# Altium PCB Narwhal_main_FIX.PcbDoc (part 1 of 2)
Units mm, origin at the board's own origin, x right, y up, seen from the top; angles counter-clockwise.
Board outline 83 x 16.93 mm, 4 copper layers (Top Layer, Layer 1, Layer 2, Bottom Layer), stack 1.58 mm thick; 96 components, 73 nets, 381 pads, 194 vias.
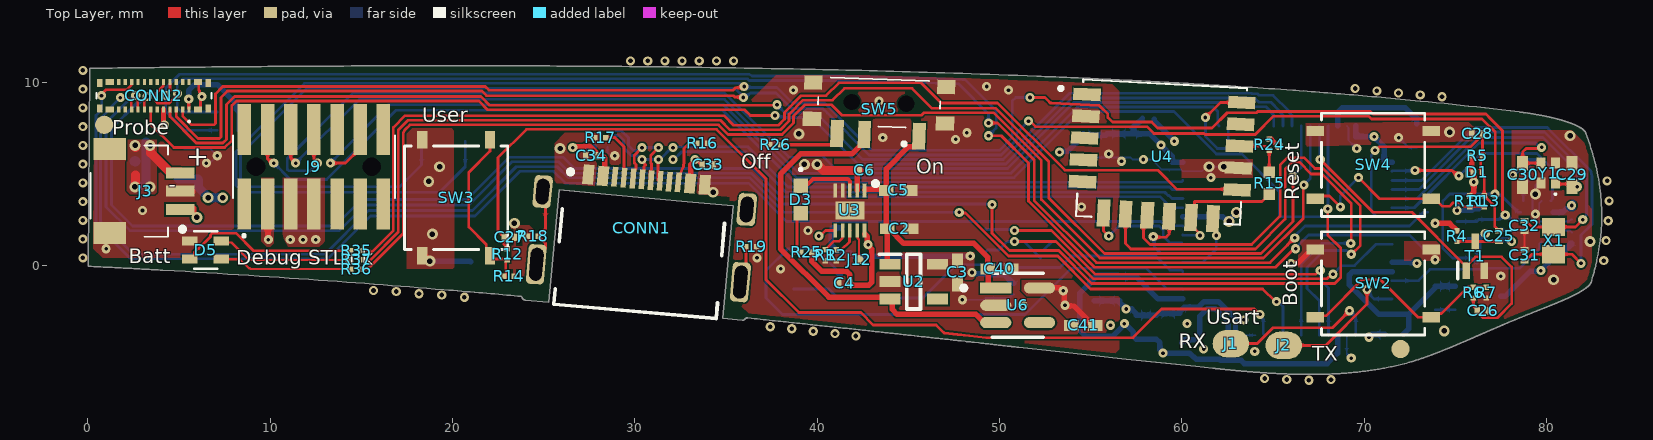
[diagram p0: Top Layer view]
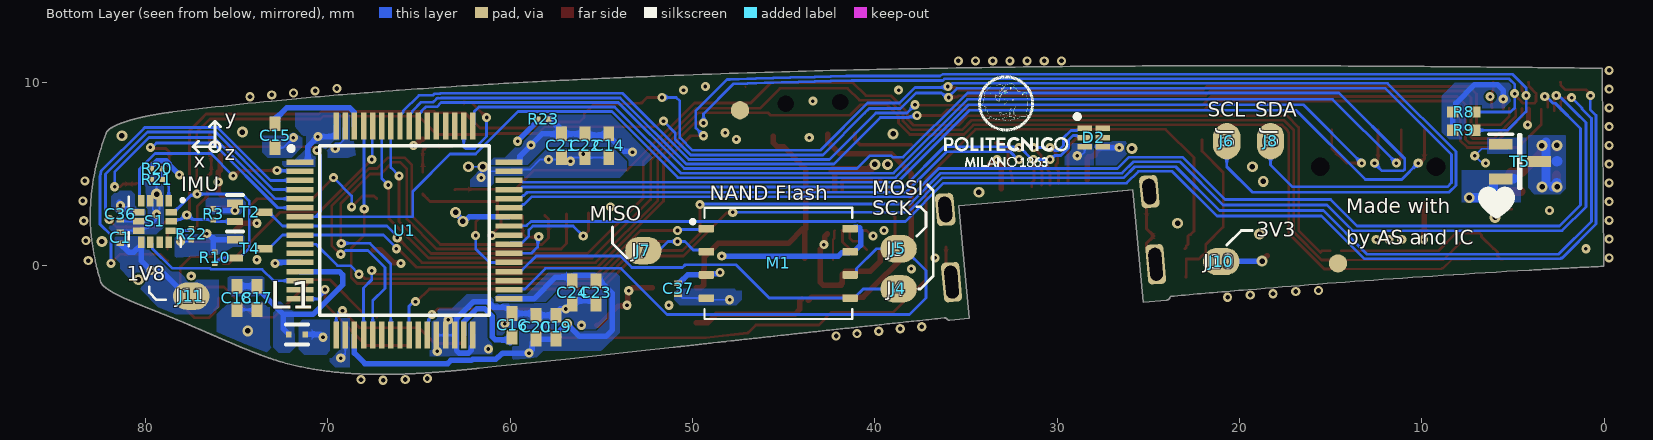
[diagram p1: Bottom Layer view, seen from below]
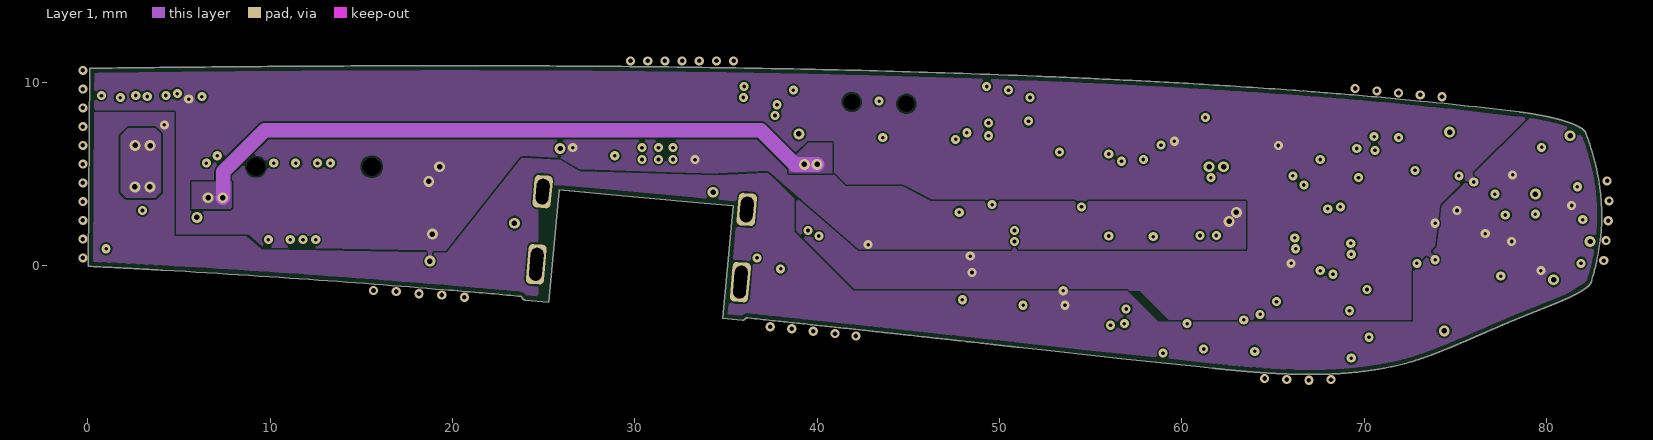
[diagram p2: Layer 1]
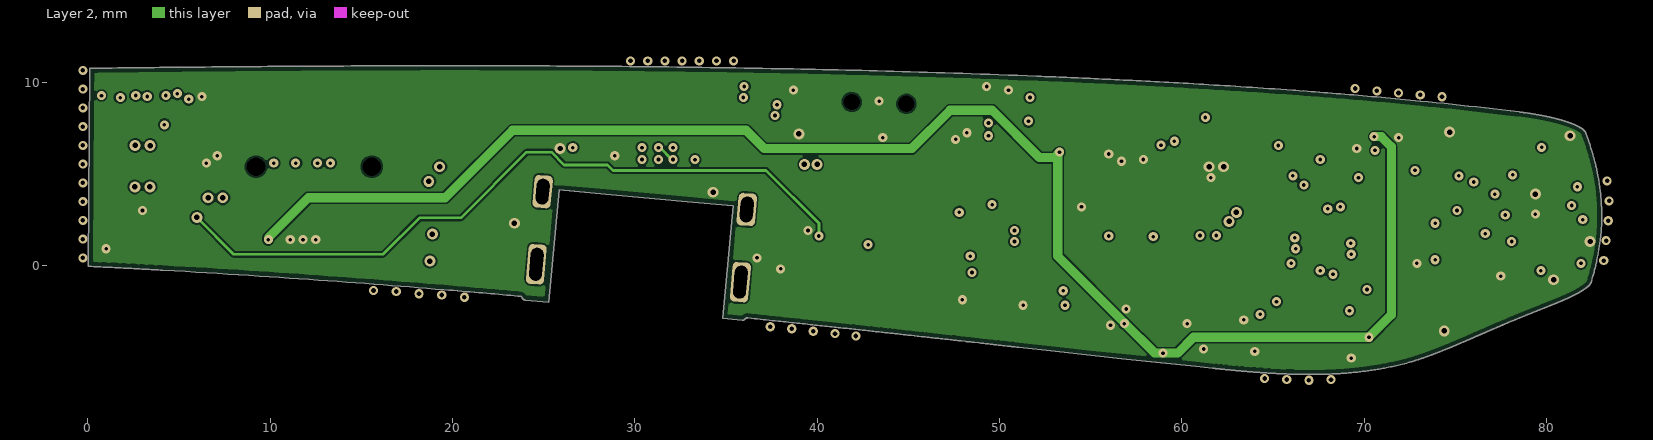
[diagram p3: Layer 2]
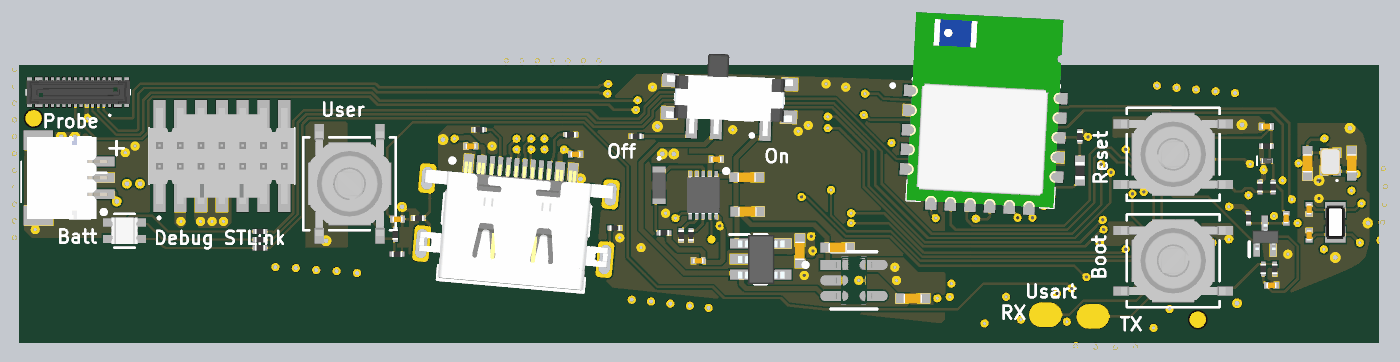
[diagram p5: 3D render of the assembled board from above, using the file's embedded part models]
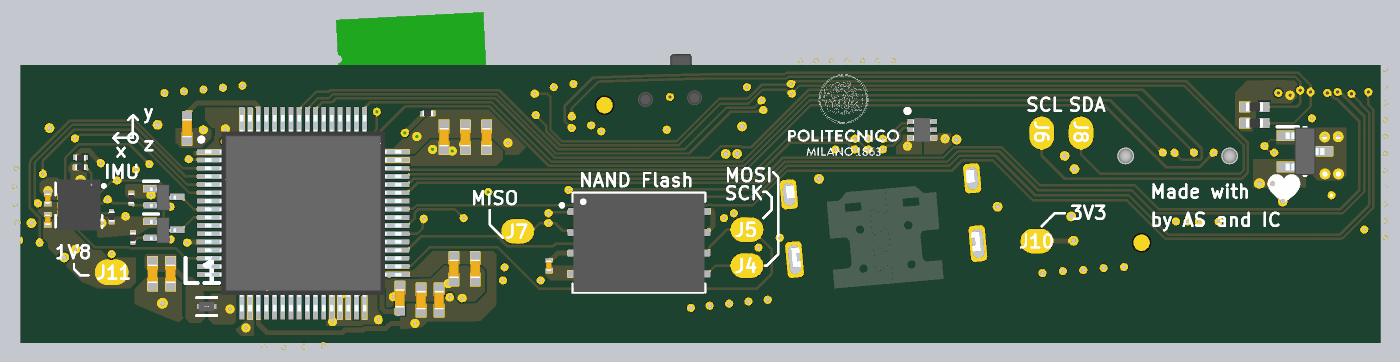
[diagram p6: 3D render of the assembled board from below, using the file's embedded part models]

## Layer stack, top to bottom
Top Solder: solder mask 0.0102, Solder Resist, Dk 3.5
Top Layer: signal copper 0.0356
Dielectric 2: prepreg 0.4795, PP-006, Dk 4.1
Layer 1: signal copper 0.035
Dielectric 1: dielectric 0.4795, FR-4, Dk 4.8
Layer 2: signal copper 0.035
Dielectric 3: prepreg 0.4795, PP-006, Dk 4.1
Bottom Layer: signal copper 0.0356
Bottom Solder: solder mask 0.0102, Solder Resist, Dk 3.5

## Board outline
2891 vertices, not listed, extent 0.031,-5.992 83.035,10.939

## Design rules (kind name [scope] priority, off if disabled: settings)
BoardOutlineClearance [All] p1: gap=0.254 ignorepadtopadclearanceinfootprint=FALSE except(0: Arc-SplitContinuation Track-SplitContinuation SMDPad-SplitContinuation THPad-SplitContinuation Via-SplitContinuation Fill-SplitContinuation Poly-SplitContinuation Region-SplitContinuation Text-SplitContinuation)
Clearance [All] p1: gap=0.1 ignorepadtopadclearanceinfootprint=FALSE
ComponentClearance [All] p1 off: gap=0.254 collisioncheckmode=3 verticalgap=0.254 showdistances=FALSE
DiffPairsRouting [All] p1: maxlimit=10 minlimit=0.125 mostfreqgap=0.15 toplayer_minwidth=0.156 toplayer_maxwidth=0.381 toplayer_prefwidth=0.381 midlayer1_minwidth=0.156 midlayer1_maxwidth=0.381 midlayer1_prefwidth=0.381 midlayer2_minwidth=0.156 midlayer2_maxwidth=0.381 midlayer2_prefwidth=0.381 bottomlayer_minwidth=0.156 bottomlayer_maxwidth=0.381 bottomlayer_prefwidth=0.381 maxuncoupledlength=12.7
FabricationTestPointUsage FabricationTestPointUsage_1 [All] p1: valid=0 allowmultiple=FALSE
FabricationTestpoint FabricationTestpoint_1 [All] p1: side=3 testpointundercomponent=TRUE minsize=1.016 maxsize=2.54 preferedsize=1.524 minholesize=0 maxholesize=1.016 preferedholesize=0.813 testpointgrid=0.025 allowsidetop=TRUE allowsidebottom=TRUE usegrid=TRUE gridtolerance=0
HoleSize [All] p1: absolutevalues=TRUE maxlimit=6 minlimit=0.2 maxpercent=80.000 minpercent=20.000
HoleSize FabricationTestpoint [All] p2 off: absolutevalues=TRUE maxlimit=2.54 minlimit=0.025 maxpercent=80.000 minpercent=20.000
HoleSize FabricationTestPointUsage [All] p3 off: absolutevalues=TRUE maxlimit=2.54 minlimit=0.025 maxpercent=80.000 minpercent=20.000
MinimumSolderMaskSliver [All] p1 off: minsoldermaskwidth=0.07
MinimumSolderMaskSliver SilkscreenOverComponentPads [All] p2: minsoldermaskwidth=0.1
PlaneClearance [All] p1: clearance=0.5
PlaneConnect [All] p1: planeconnectstyle=Relief reliefexpansion=0.4 reliefentries=4 reliefconductorwidth=0.15 reliefairgap=0.15
PolygonConnect [All] p1: connectstyle=Direct reliefconductorwidth=0.15 reliefentries=4 polygonreliefangle="90 Angle" airgapwidth=0.254
RoutingCorners [All] p1: cornerstyle=45-Degree minsetback=1.25 maxsetback=1.25
RoutingVias [All] p1: holewidth=0.3 width=0.6 viastyle="Through Hole" minholewidth=0.2 minwidth=0.45 maxholewidth=0.45 maxwidth=0.75
SilkToSilkClearance [All] p1 off: silktosilkclearance=0.254
SilkToSolderMaskClearance [IsPad] p1 off: minsilkscreentomaskgap=0.254 clearancetoexposedcopper=TRUE
SolderMaskExpansion Via [IsVia] p1: expansion=-0.61 istentingtop=FALSE
SolderMaskExpansion [All] p2: expansion=0.03 istentingtop=FALSE
SupplyNets "Schematic Supply Nets" [InNet('SYS')] p1: voltage=0.000
SupplyNets "Schematic Supply Nets_7" [InNet('5V_USB')] p2: voltage=0.000
SupplyNets "Schematic Supply Nets_5" [InNet('GND')] p3: voltage=0.000
SupplyNets "Schematic Supply Nets_6" [InNet('3V3')] p4: voltage=0.000
SupplyNets "Schematic Supply Nets_4" [InNet('3V3_BLE')] p5: voltage=0.000
SupplyNets "Schematic Supply Nets_2" [InNet('1V8')] p6: voltage=0.000
SupplyNets "Schematic Supply Nets_1" [InNet('MCU_3V3')] p7: voltage=0.000
Width [All] p1: maxlimit=10 minlimit=0.1 preferedwidth=0.15
19 further rules are at their usual default settings.

## Classes and differential pairs
component class Power: C2 C3 C4 C5 C6 C40 C41 D3 D5 J3 J10 J11 J12 R1 R2 R25 R26 R35 R36 R37 SW5 T5 U2 U3 U6
component class Peripherals: C1 C33 C34 C36 C37 CONN1 CONN2 D2 J1 J2 J4 J5 J6 J7 J8 M1 R15 R16 R17 R18 R19 R20 R21 R22 R24 S1 U4
component class Microcontroller: C14 C15 C16 C17 C18 C19 C20 C21 C22 C23 C24 C25 C26 C27 C28 C29 C30 C31 C32 D1 J9 L1 R3 R4 R5 R6 R7 R8 R9 R10 R11 R12 R13 R14 R23 SW2 SW3 SW4 T1 T2 T4 U1 X1 Y1
differential pair USB_OTG: +USB_OTG_P -USB_OTG_N

## Components (designator, comment, footprint, x,y, rotation, side; value= is the part's Value field where it differs from the comment)
C1 "0201ZD104KAT2A" Chip2PinSM127P600-8N#1 81.4,1.5 r270 bottom value=100nF
C2 "0402YD105KAT4A" Chip2PinSM127P600-8N#2 44.5,2 r180 top value=1µF
C3 "LMK105BJ225MV-F" Chip2PinSM127P600-8N#2 47.7,-0.4 r90 top value=2.2µF
C4 "CL03A105KP3NSNC" Chip2PinSM127P600-8N#1 41.5,-1 r0 top value=1µF
C5 "0402ZD106MAT2A" Chip2PinSM127P600-8N#2 44.45,4.1 r0 top value=10µF
C6 "CL03A105KP3NSNC" Chip2PinSM127P600-8N#1 42.6,5.2 r180 top value=1µF
C14 "0402YC104JAT4A" Chip2PinSM127P600-8N#2 54.6,6.55 r90 bottom value=100nF
C15 "TMK105BJ105MV-F" Chip2PinSM127P600-8N#2 72.9,7.1 r90 bottom value=1µF
C16 "TMK105BJ105MV-F" Chip2PinSM127P600-8N#2 59.9,-3.3 r270 bottom value=1µF
C17 "TMK105BJ105MV-F" Chip2PinSM127P600-8N#2 73.9,-1.8 r90 bottom value=1µF
C18 "0402YC104JAT4A" Chip2PinSM127P600-8N#2 75,-1.8 r90 bottom value=100nF
C19 "0402ZD106MAT2A" Chip2PinSM127P600-8N#2 57.5,-3.4 r270 bottom value=10µF
C20 "0402YC104JAT4A" Chip2PinSM127P600-8N#2 58.6,-3.4 r270 bottom value=100nF
C21 "0402ZD106MAT2A" Chip2PinSM127P600-8N#2 57.2,6.55 r90 bottom value=10µF
C22 "0402YC104JAT4A" Chip2PinSM127P600-8N#2 55.9,6.55 r90 bottom value=100nF
C23 "0402ZD106MAT2A" Chip2PinSM127P600-8N#2 55.3,-1.5 r90 bottom value=10µF
C24 "0402YC104JAT4A" Chip2PinSM127P600-8N#2 56.6,-1.5 r90 bottom value=100nF
C25 "02016D475MAT2A" Chip2PinSM127P600-8N#1 77.4,1.6 r90 top value=4.7µF
C26 "CL03A105KP3NSNC" Chip2PinSM127P600-8N#1 76.5,-2.5 r180 top value=1µF
C27 "CL03A105KP3NSNC" Chip2PinSM127P600-8N#1 23.129,1.539 r180 top value=1µF
C28 "CL03A105KP3NSNC" Chip2PinSM127P600-8N#1 76.2,7.2 r0 top value=1µF
C29 "C0402C309K4GACTU" Chip2PinSM127P600-8N#2 81.4,4.95 r270 top value=3pF
C30 "C0402C309K4GACTU" Chip2PinSM127P600-8N#2 78.7,4.95 r90 top value=3pF
C31 "GRM0335C1E180JA01D" Chip2PinSM127P600-8N#1 78.8,0.55 r270 top value=18pF
C32 "GRM0335C1E180JA01D" Chip2PinSM127P600-8N#1 78.8,2.15 r90 top value=18pF
C33 "CL03A105KP3NSNC" Chip2PinSM127P600-8N#1 34,5.5 r180 top value=1µF
C34 "CL03A105KP3NSNC" Chip2PinSM127P600-8N#1 27.6,6 r0 top value=1µF
C36 "0201ZD104KAT2A" Chip2PinSM127P600-8N#1 81.4,2.8 r90 bottom value=100nF
C37 "CL03A105KP3NSNC" Chip2PinSM127P600-8N#1 50.8,-1.3 r90 bottom value=1µF
C40 "0402YD105KAT4A" Chip2PinSM127P600-8N#2 50,-0.2 r180 top value=1µF
C41 "LMK105BJ225MV-F" Chip2PinSM127P600-8N#2 54.6,-3.3 r0 top value=2.2µF
CONN1 "USB4510-03-1-A" USB4510-03-1-A-Footprint-1 30.297,0.706 r355 top
CONN2 "BM29B0.6-24DS/2-0.35V(51)" BM29B0.6-24DS_2-0.35V(51)-Footprint-1 3.753,9.292 r0 top
D1 "SDM02U30LP3-7B" SDM02U30LP3-7B-Footprint-1 76.21,5.1 r0 top
D2 "HSP062-2M6" HSP062-2M6-Footprint-1 28,7 r180 bottom
D3 "KS EELP41.22-P1R2-58-A8J8-020-R18" "KS EELP41.22-P1R2-58-A8J8-020-R18-Footprint-1" 39.1,3.6 r270 top
D5 "XZM2ACRM2DGFBB110W" XZM2ACRM2DGFBB110W-Footprint-1 6.456,0.831 r0 top
J1 "Pad" Pad-Footprint-1#1 62.7,-4.3 r0 top
J2 "Pad" Pad-Footprint-1#1 65.6,-4.4 r0 top
J3 "SM03B-SRSS-TB(LF)(SN)" SM03B-SRSS-TB(LF)(SN)-Footprint-1 2.61,4.064 r270 top
J4 "Pad" Pad-Footprint-1#1 38.7,-1.3 r180 bottom
J5 "Pad" Pad-Footprint-1#1 38.7,0.9 r180 bottom
J6 "Pad" Pad-Footprint-1#1 20.7,6.8 r270 bottom
J7 "Pad" Pad-Footprint-1#1 52.7,0.8 r180 bottom
J8 "Pad" Pad-Footprint-1#1 18.3,6.8 r270 bottom
J9 "FTSH-107-01-L-DV-K-A" FTSH-107-01-L-DV-K-A-Footprint-1 12.4,5.4 r0 top
J10 "Pad" Pad-Footprint-1#1 21,0.2 r180 bottom
J11 "Pad" Pad-Footprint-1#1 77.5,-1.7 r180 bottom
J12 "Pad" Pad-Footprint-1#2 42.3,0.3 r90 top
L1 "PLEA67BBA2R2M-1PT00" FP-PLEA67-MFG 71.7,-3.8 r180 bottom
M1 "MT29F4G01ABAFDWB-IT:F TR" "MT29F4G01ABAFDWB-IT:F TR-Footprint-1" 45.3,0.1 r180 bottom
R1 "TNPW020118K0BEED" Chip2PinSM127P600-8N#3 40.45,0.55 r90 top value=18k
R2 "TNPW02013K00BEED" Chip2PinSM127P600-8N#3 41.05,0.55 r90 top value=3k
R3 "CR0201-JW-472GLF" Chip2PinSM127P600-8N#3 76.3,2.8 r90 bottom value=4.7k
R4 "ERJ-1GNJ104C" Chip2PinSM127P600-8N#3 75.1,1.6 r90 top value=100k
R5 "ERJ-1GNJ104C" Chip2PinSM127P600-8N#3 76.2,6 r180 top value=100k
R6 "CR0201-FW-3302GLF" Chip2PinSM127P600-8N#3 76,-1.5 r90 top value=33k
R7 "CR0201-JW-472GLF" Chip2PinSM127P600-8N#3 76.7,-1.5 r90 top value=4.7k
R8 "CRCW04024K70FKED" RESC1005X04N 7.7,8.4 r0 bottom value=4.7k
R9 "CRCW04024K70FKED" RESC1005X04N 7.7,7.4 r0 bottom value=4.7k
R10 "CR0201-JW-472GLF" Chip2PinSM127P600-8N#3 76.2,0.4 r90 bottom value=4.7k
R11 "CR0201-JW-472GLF" Chip2PinSM127P600-8N#3 75.8,3.5 r90 top value=4.7k
R12 "CR0201-FW-3302GLF" Chip2PinSM127P600-8N#3 23,0.6 r270 top value=33k
R13 "CR0201-FW-3302GLF" Chip2PinSM127P600-8N#3 76.6,3.5 r270 top value=33k
R14 "CR0201-JW-472GLF" Chip2PinSM127P600-8N#3 23.1,-0.6 r180 top value=4.7k
R15 "CRCW04024K70FKED" RESC1005X04N 64.8,4.5 r90 top value=4.7k
R16 "ERJ-1GNF5101C" Chip2PinSM127P600-8N#3 33.7,6.7 r180 top value=5.1k
R17 "ERJ-1GNF5101C" Chip2PinSM127P600-8N#3 28.1,7 r0 top value=5.1k
R18 "CRCW02010000Z0ED" Chip2PinSM127P600-8N#3 24.4,1.6 r0 top value=0
R19 "CRCW02010000Z0ED" Chip2PinSM127P600-8N#3 36.4,1 r180 top value=0
R20 "CRCW02010000Z0ED" Chip2PinSM127P600-8N#3 79.4,5.3 r180 bottom value=0
R21 "CRCW02010000Z0ED" Chip2PinSM127P600-8N#3 79.4,4.7 r180 bottom value=0
R22 "CR0201-JW-472GLF" Chip2PinSM127P600-8N#3 77.5,1.7 r270 bottom value=4.7k
R23 "CRCW02010000Z0ED" Chip2PinSM127P600-8N#3 58.2,8 r0 bottom value=0
R24 "CRCW02010000Z0ED" Chip2PinSM127P600-8N#3 64.8,6.6 r90 top value=0
R25 "CRCW0201665RFKED" Chip2PinSM127P600-8N#3 39.4,0.7 r180 top value=665
R26 "ERJ-1GNJ104C" Chip2PinSM127P600-8N#3 37.7,6.6 r0 top value=100k
R35 "CRCW0201360RFKED" Chip2PinSM127P600-8N#3 14.726,0.786 r0 top value=360
R36 "CRCW0201360RFKED" Chip2PinSM127P600-8N#3 14.726,-0.214 r0 top value=360
R37 "ERA-1AEB4990C" Chip2PinSM127P600-8N#3 14.726,0.286 r0 top value=499
S1 "LSM6DSO16IS" LSM6DSO16IS-Footprint-1 79.5,2.4 r270 bottom
SW2 "PTS526SK15SMTR2LFS" PTS526SK15SMTR2LFS-Footprint-1 70.5,-1 r180 top
SW3 "PTS526SK15SMTR2LFS" PTS526SK15SMTR2LFS-Footprint-1 20.2,3.7 r90 top
SW4 "PTS526SK15SMTR2LFS" PTS526SK15SMTR2LFS-Footprint-1 70.5,5.5 r0 top
SW5 "EG1215AA" EG1215AA-Footprint-1 43.4,8.9 r178 top
T1 "DMN26D0UT-7" DMN26D0UT-7-Footprint-1 76.1,0.5 r90 top
T2 "DMN26D0UT-7" DMN26D0UT-7-Footprint-1 74.3,2.9 r180 bottom
T4 "DMN26D0UT-7" DMN26D0UT-7-Footprint-1 74.3,0.9 r180 bottom
T5 "SI2323DS-T1-GE3" SI2323DS-T1-GE3-Footprint-1 4.623,5.683 r180 bottom
U1 "STM32U575RIT6Q" STM32U575RIT6Q-Footprint-1 65.8,1.9 r180 bottom
U2 "AP2205-33W5-7" AP2205-33W5-7-Footprint-1 45.3,-0.9 r0 top
U3 "BQ25185DLHR" BQ25185DLHR-Footprint-1 41.8,3 r270 top
U4 "RN4871-V/RM140" RN4871-V_RM118-Footprint-1 59,8.2 r357 top
U6 "AP2205-18W5-7" AP2205-18W5-7-Footprint-1 51,-2.2 r0 top
X1 "NX2012SA-32.768K-STD-MUB-1" NX2012SA-32.768K-STD-MUB-1-Footprint-1 80.4,1.35 r270 top
Y1 "830072539" 830072539-Footprint-1 80.1,5.05 r90 top

## Footprints (in the part's own frame and the unit in brackets; to place one, negate y for a bottom-side part, rotate by r counter-clockwise, add the part's x,y. Pads: shape width x height; smd on the part's side, far side on the other; paste and mask are expansions set on the pad)
830072539-Footprint-1 [mm]
  rect 0.6x0.5 smd: 1(-0.55,-0.4) 2(0.55,-0.4) 3(0.55,0.4) 4(-0.55,0.4)
  silkscreen extent -1.2,-0.45 -1.1,-0.35, body extent -0.8,-0.6 0.8,0.6, height 0.4
AP2205-18W5-7-Footprint-1 [mm]
  rect 1.707x0.616 smd paste+0 mask+0: 1(-1.201,0.95)
  rrect100% 1.707x0.616 smd paste+0 mask+0: 2(-1.201,0) 3(-1.201,-0.95) 4(1.201,-0.95) 5(1.201,0.95)
  silkscreen extent -3.08,-1.75 1.4,1.75, body extent -1.4,-1.47 1.4,1.45, height 1.45
AP2205-33W5-7-Footprint-1 [mm]
  rect 1.15x0.6 smd: 1(-1.3,0.95) 2(-1.3,0) 3(-1.3,-0.95) 4(1.3,-0.95) 5(1.3,0.95)
  silkscreen extent -1.88,-1.5 0.38,1.5, body extent -1.39,-1.52 1.46,1.48, height 1.4
BM29B0.6-24DS_2-0.35V(51)-Footprint-1 [mm]
  rect 0.18x0.32 smd mask+0.05: 1(1.798,-0.75) 2(1.798,0.75) 3(1.448,-0.75) 4(1.448,0.75) 5(1.098,-0.75) 6(1.098,0.75) 7(0.748,-0.75) 8(0.748,0.75) 9(0.398,-0.75) 10(0.398,0.75) 11(0.048,-0.75) 12(0.048,0.75) 13(-0.302,-0.75) 14(-0.302,0.75) 15(-0.652,-0.75) 16(-0.652,0.75) 17(-1.002,-0.75) 18(-1.002,0.75) 19(-1.352,-0.75) 20(-1.352,0.75) 21(-1.702,-0.75) 22(-1.702,0.75) 23(-2.052,-0.75) 24(-2.052,0.75)
  rect 0.46x0.32 smd mask+0.05: P1_1(2.288,-0.75) P1_2(2.288,0.75) P2_1(-2.542,-0.75) P2_2(-2.542,0.75)
  rect 0.3x0.42 smd: P1_3(2.838,-0.7) P1_4(2.838,0.7) P2_3(-3.092,-0.7) P2_4(-3.092,0.7)
  silkscreen extent -3.28,-1.46 3.03,0.15, body extent -3.28,-0.75 3.03,0.75, height 0.57
BQ25185DLHR-Footprint-1 [mm]
  rect 0.75x0.2 smd: 1(-1.1,0.8) 2(-1.1,0.4) 3(-1.1,0) 4(-1.1,-0.4) 5(-1.1,-0.8) 6(1.1,-0.8) 7(1.1,-0.4) 8(1.1,0) 9(1.1,0.4) 10(1.1,0.8)
  rect 1x1.6 smd: 11(0,0)
  silkscreen extent -1.6,1.28 -1.35,1.53, body extent -1.15,-1 1.15,1, height 0.8
Chip2PinSM127P600-8N#1 [mm] "Chip capacitor ceramic multilayer, 0201in, SMD"
  rect 0.3x0.42 smd: 1(-0.3,0) 2(0.3,0)
  body extent -0.33,-0.18 0.33,0.18, height 0.35
Chip2PinSM127P600-8N#2 [mm] "Chip Capacitor Ceramic Multilayer, 0402in, SMD"
  rect 0.8x0.6 smd: 1(-0.65,0) 2(0.65,0)
  body extent -0.58,-0.3 0.58,0.3, height 0.6
Chip2PinSM127P600-8N#3 [mm] "Chip Resistor, 0201in, SMD"
  rect 0.3x0.3 smd: 1(-0.3,0) 2(0.3,0)
  body extent -0.32,-0.17 0.32,0.17, height 0.26
DMN26D0UT-7-Footprint-1 [mm]
  rect 0.9x0.4 smd: 1(-0.8,0.5) 2(-0.8,-0.5) 3(0.8,0)
  silkscreen extent -1.25,0.95 -0.35,0.95, body extent -0.86,-0.83 0.74,0.77, height 0.9
EG1215AA-Footprint-1 [mm]
  rect 0.7x1.5 smd: 1(-2.25,1.75) 2(0.75,1.75) 3(2.25,1.75)
  round 0.45 hole 0.9 unplated: MH1(-1.5,0) MH2(1.5,0)
  rect 1x0.8 smd: MP1(-3.65,1) MP2(3.65,1) MP3(-3.65,-1) MP4(3.65,-1)
  silkscreen extent -3.35,-1.3 3.35,2.3, body extent -3.85,-2.7 3.85,2.2, height 1.4
FP-PLEA67-MFG [mm]
  rect 0.31x0.32 smd paste+0 mask+0: 1(-0.445,0) 2(0.445,0)
  silkscreen extent -0.6,-0.55 0.6,0.55, body extent -0.5,-0.3 0.5,0.3, height 0.8
FTSH-107-01-L-DV-K-A-Footprint-1 [mm]
  rect 0.74x2.79 smd: 1(-3.81,-2.035) 2(-3.81,2.035) 3(-2.54,-2.035) 4(-2.54,2.035) 5(-1.27,-2.035) 6(-1.27,2.035) 7(0,-2.035) 8(0,2.035) 9(1.27,-2.035) 10(1.27,2.035) 11(2.54,-2.035) 12(2.54,2.035) 13(3.81,-2.035) 14(3.81,2.035)
  round 0.51 hole 1.02 unplated: 15(-3.175,0) 16(3.175,0)
  silkscreen extent -4.44,-3.83 4.44,1.72, body extent -4.44,-2.92 4.44,2.92, height 6.1
HSP062-2M6-Footprint-1 [mm]
  rect 0.8x0.3 smd: 1(-0.5,0.5) 2(-0.5,0) 3(-0.5,-0.5) 4(0.5,-0.5) 5(0.5,0) 6(0.5,0.5)
  silkscreen extent -1.03,1.03 -0.78,1.27, body extent -0.55,-0.72 0.55,0.72, height 0.6
"KS EELP41.22-P1R2-58-A8J8-020-R18-Footprint-1" [mm]
  rect 0.8x0.8 smd: 1(-0.75,0) 2(0.75,0)
  silkscreen extent -1.7,-0.05 -1.6,0.05, body extent -0.8,-0.4 0.8,0.4, height 0.6
LSM6DSO16IS-Footprint-1 [mil]
  rect 25x14 smd paste+0 mask+4: 1(-44.49,29.9) 2(-44.49,10.21) 3(-44.49,-9.48) 4(-44.49,-29.17) 8(44.51,-29.17) 9(44.51,-9.48) 10(44.51,10.21) 11(44.51,29.9)
  rect 14x25 smd paste+0 mask+4: 5(-19.68,-34.64) 6(0.01,-34.64) 7(19.7,-34.64) 12(19.7,35.36) 13(0.01,35.36) 14(-19.68,35.36)
  silkscreen extent -53,-56 54,62, body extent -61,-51 61,51, height 34
"MT29F4G01ABAFDWB-IT:F TR-Footprint-1" [mm]
  rrect25% 0.84x0.42 smd: 1(-3.945,1.905) 2(-3.945,0.635) 3(-3.945,-0.635) 4(-3.945,-1.905) 5(3.945,-1.905) 6(3.945,-0.635) 7(3.945,0.635) 8(3.945,1.905)
  silkscreen extent -4.8,-3.05 4.05,3.05, body extent -4,-3 4,3, height 0.65
NX2012SA-32.768K-STD-MUB-1-Footprint-1 [mm]
  rect 1x1.25 smd: 1(-0.75,0) 2(0.75,0)
  body extent -1.02,-0.6 1.02,0.6, height 0.55
Pad-Footprint-1#1 [mm]
  oval 2x1.5 smd paste-0.75: 1(0,0)
Pad-Footprint-1#2 [mm]
  round 0.5 smd paste-0.25: 1(0,0)
PTS526SK15SMTR2LFS-Footprint-1 [mil]
  rect 37.5x22 smd paste+0 mask+0: 1(-125.25,73) 2(125.25,73) 3(-125.25,-73) 4(125.25,-73)
  silkscreen extent -112,-112 112,112, body extent -126,-100 126,100, height 60
RESC1005X04N [mm] "Chip Resistor, 0402in, 2-Leads, Body 1,00x0,50mm, IPC Medium Density"
  rect 0.635x0.61 smd: 1(-0.597,0) 2(0.597,0)
  body extent -0.53,-0.28 0.53,0.28, height 0.4
RN4871-V_RM118-Footprint-1 [mm]
  rect 1.5x0.7 smd: 1(-4.25,0.95) 2(-4.25,-0.25) 3(-4.25,-1.45) 4(-4.25,-2.65) 5(-4.25,-3.85) 12(4.25,-3.85) 13(4.25,-2.65) 14(4.25,-1.45) 15(4.25,-0.25) 16(4.25,0.95)
  rect 0.7x1.5 smd: 6(-3,-5.5) 7(-1.8,-5.5) 8(-0.6,-5.5) 9(0.6,-5.5) 10(1.8,-5.5) 11(3,-5.5)
  silkscreen extent -5.8,-5.75 4.5,1.75, body extent -4.5,-5.75 4.5,5.75, height 2.1
SDM02U30LP3-7B-Footprint-1 [mm]
  rect 0.23x0.3 smd: 1(-0.254,0) 2(0.254,0)
  silkscreen extent -0.58,-0.25 -0.58,0.26, body extent -0.31,-0.16 0.31,0.16, height 0.3
SI2323DS-T1-GE3-Footprint-1 [mm]
  rect 1.3x0.6 smd: 1(-1.05,0.95) 2(-1.05,-0.95) 3(1.05,0)
  silkscreen extent -1.7,-1.46 0.05,1.5, body extent -1.18,-1.46 1.18,1.46, height 1.12
SM03B-SRSS-TB(LF)(SN)-Footprint-1 [mm]
  rect 0.6x1.55 smd: 1(-1,2.463) 2(0,2.463) 3(1,2.463)
  rect 1.2x1.8 smd: MP1(-2.3,-1.413) MP2(2.3,-1.413)
  silkscreen extent -2.5,-2.46 2.5,1.79, body extent -2.5,-2.12 2.5,2.83, height 2.9
STM32U575RIT6Q-Footprint-1 [mm]
  rect 1.475x0.3 smd: 1(-5.738,3.75) 2(-5.738,3.25) 3(-5.738,2.75) 4(-5.738,2.25) 5(-5.738,1.75) 6(-5.738,1.25) 7(-5.738,0.75) 8(-5.738,0.25) 9(-5.738,-0.25) 10(-5.738,-0.75) 11(-5.738,-1.25) 12(-5.738,-1.75) 13(-5.738,-2.25) 14(-5.738,-2.75) 15(-5.738,-3.25) 16(-5.738,-3.75) 33(5.738,-3.75) 34(5.738,-3.25) 35(5.738,-2.75) 36(5.738,-2.25) 37(5.738,-1.75) 38(5.738,-1.25) 39(5.738,-0.75) 40(5.738,-0.25) 41(5.738,0.25) 42(5.738,0.75) 43(5.738,1.25) 44(5.738,1.75) 45(5.738,2.25) 46(5.738,2.75) 47(5.738,3.25) 48(5.738,3.75)
  rect 0.3x1.475 smd: 17(-3.75,-5.738) 18(-3.25,-5.738) 19(-2.75,-5.738) 20(-2.25,-5.738) 21(-1.75,-5.738) 22(-1.25,-5.738) 23(-0.75,-5.738) 24(-0.25,-5.738) 25(0.25,-5.738) 26(0.75,-5.738) 27(1.25,-5.738) 28(1.75,-5.738) 29(2.25,-5.738) 30(2.75,-5.738) 31(3.25,-5.738) 32(3.75,-5.738) 49(3.75,5.738) 50(3.25,5.738) 51(2.75,5.738) 52(2.25,5.738) 53(1.75,5.738) 54(1.25,5.738) 55(0.75,5.738) 56(0.25,5.738) 57(-0.25,5.738) 58(-0.75,5.738) 59(-1.25,5.738) 60(-1.75,5.738) 61(-2.25,5.738) 62(-2.75,5.738) 63(-3.25,5.738) 64(-3.75,5.738)
  silkscreen extent -6.35,-4.65 4.65,4.65, body extent -6,-6 6,6, height 1.6
USB4510-03-1-A-Footprint-1 [mm]
  rect 0.6x1.1 smd: A1(-3.2,4) A4(-2.4,4) A9(2.4,4) A12(3.2,4)
  rect 0.3x1.1 smd: A5(-1.25,4) A6(-0.25,4) A7(0.25,4) A8(1.25,4) B5(1.75,4) B6(0.75,4) B7(-0.75,4) B8(-1.75,4)
  rrect50% 1x1.8 hole 0.7 slot 1.4 at 90 deg paste+0.05: MH1(-5.62,2.85) MH4(5.62,2.85)
  rrect50% 1x2.2 hole 0.7 slot 1.8 at 90 deg paste+0.05: MH2(-5.62,-1.15) MH3(5.62,-1.15)
  silkscreen extent -4.47,-3.25 4.47,4.19, body extent -5.77,-3.12 5.77,4.08, height 1.56
XZM2ACRM2DGFBB110W-Footprint-1 [mm]
  rect 0.85x0.5 smd paste+0 mask+0: 1(-0.875,0.5) 2(0.875,0.5) 3(0.875,-0.5) 4(-0.875,-0.5)
  silkscreen extent -1.4,-1.03 0.62,1.27, body extent -0.8,-0.8 0.8,0.8, height 0.7

## Part data
C1 C36: library part CMP-00064-2, "Ceramic Capacitor, Non-polarized, Multilayer, Ceramic, 10V, 10% +Tol, 10% -Tol, X5R, 15% TC, 0.1uF, Surface Mount, 0201", Capacitor Type=Ceramic, Case/Package=0201, Max Operating Temperature=85°C, Min Operating Temperature=-55°C, Package Shape=Rectangular, Package Style=SMTMeter, Rated DC Voltage (URdc)=10V, Temperature Characteristics Code=X5R, Tolerance  (fill in as +-)=10%, Dielectric Material=Ceramic, Height=0.33mm, JESD-609 Code=e3, Length=0.6mm, Mounting Technology="Surface Mount", Multilayer=Yes, Packaging="Tape and Reel", Pins=2, Reach SVHC Compliant=Yes, RoHS Compliant=Yes, Terminal Finish=Nickel, Termination=Wraparound, Tolerance (fill in as +-)=10%, Width=0.3mm
C2 C40: library part CMP-001-00107-6, "Ceramic Capacitor, Multilayer, Ceramic, 16V, 10% +Tol, 10% -Tol, X5R, 15% TC, 1uF, Surface Mount, 0402", Capacitor Type=Ceramic, Case/Package=0402, Max Operating Temperature=85°C, Min Operating Temperature=-55°C, Mounting Technology="Surface Mount", Pins=2, RoHS Compliant=Yes
C3 C41: library part CMP-001-00130-1, "Ceramic Capacitor, Multilayer, Ceramic, 10V, 20% +Tol, 20% -Tol, X5R, 15% TC, 2.2uF, Surface Mount, 0402", Capacitor Type=Ceramic, Case/Package=0402, Max Operating Temperature=85°C, Min Operating Temperature=-55°C, Mounting Technology="Surface Mount", Pins=2, RoHS Compliant=Yes
C4 C6 C26 C27 C28 C33 C34 C37: library part CMP-001-00095-4, "Ceramic Capacitor, Multilayer, Ceramic, 10V, 10% +Tol, 10% -Tol, X5R, 15% TC, 1uF, Surface Mount, 0201", Capacitor Type=Ceramic, Case/Package=0201, Max Operating Temperature=85°C, Min Operating Temperature=-55°C, Mounting Technology="Surface Mount", Pins=2, RoHS Compliant=Yes
C5: library part CMP-00044-1, "Ceramic Capacitor, Multilayer, Ceramic, 10V, 20% +Tol, 20% -Tol, X5R, 15% TC, 10uF, Surface Mount, 0402", Capacitor Type=Ceramic, Case/Package=0402, Max Operating Temperature=85°C, Min Operating Temperature=-55°C, Package Shape=Rectangular, Rated DC Voltage (URdc)=10V, Temperature Characteristics Code=X5R, Tolerance  (fill in as +-)=20%, Dielectric Material=Ceramic, JESD-609 Code=e3, Mounting Technology="Surface Mount", Multilayer=Yes, Packaging="Tape and Reel", Pins=2, Reach SVHC Compliant=Yes, RoHS Compliant=Yes, Terminal Finish=Nickel, Termination=Wraparound, Tolerance (fill in as +-)=20%
C14 C18 C20 C22 C24: library part CMP-00047-1, "Ceramic Capacitor, Multilayer, Ceramic, 16V, 5% +Tol, 5% -Tol, X7R, 15% TC, 0.1uF, Surface Mount, 0402", Capacitor Type=Ceramic, Case/Package=0402, Max Operating Temperature=125°C, Min Operating Temperature=-55°C, Package Shape=Rectangular, Package Style=SMTMeter, Rated DC Voltage (URdc)=16V, Temperature Characteristics Code=X7R, Tolerance  (fill in as +-)=5%, Dielectric Material=Ceramic, Height=0.56mm, JESD-609 Code=e3, Length=1mm, Mounting Technology="Surface Mount", Multilayer=Yes, Packaging="Tape and Reel", Pins=2, Reach SVHC Compliant=Yes, RoHS Compliant=Yes, Terminal Finish=Nickel, Termination=Wraparound, Tolerance (fill in as +-)=5%, Width=0.5mm
C15 C16 C17: library part CMP-001-00125-1, "Ceramic Capacitor, Multilayer, Ceramic, 25V, 20% +Tol, 20% -Tol, X5R, 15% TC, 1uF, Surface Mount, 0402", Capacitor Type=Ceramic, Case/Package=0402, Max Operating Temperature=85°C, Min Operating Temperature=-55°C, Mounting Technology="Surface Mount", Pins=2, RoHS Compliant=Yes
C19 C21 C23: library part CMP-001-00089-10, "Multilayer Ceramic Chip Capacitor 0402 Size 10uF 10V X5R ±20% Tolerance SMD T/R"
C25: library part CMP-001-00098-5, "Condensatori in ceramica multistrato MLCC - SMD/SMT 6.3V 4.7uF X5R 0201 20%", Max Operating Temperature=85°C, Min Operating Temperature=-55°C, Tolerance=20%, Mounting Technology="Surface Mount", RoHS Compliant=Yes
C29 C30: library part CMP-001-00094-8, "Cap Cer 3PF 16V NP0 0402", Case/Package=0402, Max Operating Temperature=125°C, Min Operating Temperature=-55°C, Tolerance=10%, Voltage Rating=16V, Mounting Technology="Surface Mount", RoHS Compliant=Yes
C31 C32: library part CMP-001-00124-2, "Ceramic Capacitor, Multilayer, Ceramic, 25V, 5% +Tol, 5% -Tol, C0G, 30ppm/Cel TC, 0.000018uF, Surface Mount, 0201", Capacitor Type=Ceramic, Case/Package=0201, Max Operating Temperature=125°C, Min Operating Temperature=-55°C, Mounting Technology="Surface Mount", Pins=2, RoHS Compliant=Yes
CONN1: library part CMP-00137-10, "Connettori USB USB C Rec 16P 3u\" Mid Mnt 1.6mm O-set SMT L = 6.5mm S-Spring"
CONN2: library part CMP-002-00106-1, "Connector Receptacle 26 Pos (24+2) SMD"
D1: library part CMP-004-00034-3, "Rectifier Diode, Schottky, 1 Phase, 1 Element, 0.1A, 30V V(RRM), Silicon", Forward Voltage=370mV, Max Operating Temperature=150°C, Min Operating Temperature=-65°C, Pins=2, RoHS Compliant=Yes
D2: library part CMP-004-00031-2, "TVS DIODE 3VWM 18VC 6UQFN / ESD Suppressor Diode Array Uni-Dir 3V 6-Pin UQFN T/R"
D3: library part CMP-007-00048-1, "Single Colour LEDs"
D5: library part CMP-00156-4, "1.6X1.6MM Rgb Full Color SMD Led"
J1 J2 J4 J5 J6 J7 J8 J10 J11 J12: library part CMP-002-00075-4, "Pad to connect external electrodes or sensors. Choose the right footprint."
J3: library part CMP-002-00112-1, "Connector Header, Side Entry, SR Series, 3 Position, 1.00mm, 50V, Surface Mount, Tin, Natural", Max Current Rating=1A, Max Operating Temperature=85°C, Min Operating Temperature=-25°C, Voltage Rating=50V, Connector Type="Male Pin", Gender=Male, Mounting Technology="Surface Mount, Termination", Pins=3
J9: library part CMP-002-00103-2, "Board Connector", Connector Type="BOARD CONNECTOR", RoHS Compliant=Yes
L1: library part CMP-006-00037-1, "Power Inductors - SMD 2.2uH 20% 620mOhm 0.5A"
M1: library part CMP-019-00055-3, "Active Non-Volatile SPI FLASH ic memory -40C~85C TA 2.7V~3.6V 4Gb 4G x 1"
R1: library part CMP-009-00240-1, "Fixed Resistor, Thin Film, 0.05W, 18000ohm, 25V, 0.1% +/-Tol, 25ppm/Cel, Surface Mount, 0201", Max Operating Temperature=125°C, Min Operating Temperature=-55°C, Tolerance=0.1%, Mounting Technology="Surface Mount"
R2: library part CMP-009-00239-1, "Fixed Resistor, Thin Film, 0.05W, 3000ohm, 25V, 0.1% +/-Tol, 25ppm/Cel, Surface Mount, 0201", Case/Package=0201, Max Operating Temperature=125°C, Min Operating Temperature=-55°C, Tolerance=0.1%, Voltage Rating=25V, Mounting Technology="Surface Mount"
R3 R7 R10 R11 R14 R22: library part CMP-00117-1, "Fixed Resistor, Metal Glaze/thick Film, 0.05W, 4700ohm, 30V, 5% +/-Tol, 200ppm/Cel, Surface Mount, 0201", Case/Package=0201, Max Operating Temperature=125°C, Min Operating Temperature=-55°C, Package Height=0.23mm, Package Length=0.6mm, Package Shape=Rectangular, Package Style=SMTMeter, Package Width=0.3mm, Power=50mW, Rated Temperature=70°C, Resistor Type="FIXED RESISTOR", Temperature Coefficient=200ppm/°C, Tolerance=5%, Working Voltage=25V, Construction=Chip, JESD-609 Code=e3, Mounting Technology="Surface Mount", Packaging="Tape and Reel", Pins=2, Reach SVHC Compliant=Yes, RoHS Compliant=Yes, Technology="RUTHENIUM OXIDE", Terminal Finish=Nickel, Termination=Wraparound
R4 R5 R26: library part CMP-009-00199-1, "Fixed Resistor, Metal Glaze/thick Film, 0.05W, 100000ohm, 25V, 5% +/-Tol, 200ppm/Cel, Surface Mount, 0201", Case/Package=0201, Max Operating Temperature=125°C, Min Operating Temperature=-55°C, Power=50mW, Tolerance=5%, Mounting Technology="Surface Mount", Pins=2, RoHS Compliant=Yes
R6 R12 R13: library part CMP-00128-1, "Fixed Resistor, Metal Glaze/thick Film, 0.05W, 33000ohm, 30V, 1% +/-Tol, 200ppm/Cel, Surface Mount, 0201", Case/Package=0201, Max Operating Temperature=125°C, Min Operating Temperature=-55°C, Package Height=0.23mm, Package Length=0.6mm, Package Shape=Rectangular, Package Style=SMTMeter, Package Width=0.3mm, Power=50mW, Rated Temperature=70°C, Resistor Type="FIXED RESISTOR", Temperature Coefficient=200ppm/°C, Tolerance=1%, Working Voltage=25V, Construction=Chip, JESD-609 Code=e3, Mounting Technology="Surface Mount", Packaging="Tape and Reel", Pins=2, Reach SVHC Compliant=Yes, RoHS Compliant=Yes, Technology="RUTHENIUM OXIDE", Terminal Finish=Nickel, Termination=Wraparound
R8 R9 R15: library part CMP-009-00183-1, "SMD Chip Resistor, 4.7 kOhm, ± 1%, 63 mW, 0402 [1005 Metric], Thick Film, General Purpose"
R16 R17: library part CMP-009-00205-1, "Fixed Resistor, Metal Glaze/thick Film, 0.05W, 5100ohm, 25V, 1% +/-Tol, 200ppm/Cel, Surface Mount, 0201", Case/Package=0201, Max Operating Temperature=125°C, Min Operating Temperature=-55°C, Power=50mW, Tolerance=1%, Mounting Technology="Surface Mount", Pins=2, RoHS Compliant=Yes
R18 R19 R20 R21 R23 R24: library part CMP-00081-1, "Fixed Resistor, Metal Glaze/thick Film, 0.05W, 0ohm, Surface Mount, 0201", Case/Package=0201, Max Operating Temperature=155°C, Min Operating Temperature=-55°C, Package Height=0.23mm, Package Length=0.6mm, Package Shape=Rectangular, Package Style=SMTMeter, Package Width=0.3mm, Power=50mW, Rated Temperature=70°C, Resistor Type="FIXED RESISTOR", Construction=Chip, JESD-609 Code=e3, Mounting Technology="Surface Mount", Packaging="Tape and Reel", Pins=2, Reach SVHC Compliant=Yes, Reference Standard=AEC-Q200, RoHS Compliant=Yes, Technology="METAL GLAZE/THICK FILM", Terminal Finish=Nickel, Termination=Wraparound
R25: library part CMP-009-00207-1, "Fixed Resistor, Metal Glaze/thick Film, 0.05W, 665ohm, 30V, 1% +/-Tol, 100ppm/Cel, Surface Mount, 0201", Case/Package=0201, Max Operating Temperature=155°C, Min Operating Temperature=-55°C, Power=50mW, Tolerance=1%, Mounting Technology="Surface Mount", Pins=2, RoHS Compliant=Yes
R35 R36: library part CMP-009-00209-1, "Fixed Resistor, Metal Glaze/thick Film, 0.05W, 360ohm, 30V, 1% +/-Tol, 100ppm/Cel, Surface Mount, 0201", Case/Package=0201, Max Operating Temperature=155°C, Min Operating Temperature=-55°C, Power=50mW, Tolerance=1%, Mounting Technology="Surface Mount", Pins=2, RoHS Compliant=Yes
R37: library part CMP-009-00210-1, "0201 Thin film chip resistor 0201 SMD Resistor 0.1% 25ppm 499ohm"
S1: library part CMP-010-00025-7, "IMU 6-axis with Intelligent Sensor Process Unit"
SW2 SW3 SW4: library part CMP-011-00019-2, "Switch Tactile N.O. SPST Round Button Gull Wing 0.05A 12VDC 200000Cycles 2.45N SMD T/R"
SW5: library part CMP-011-00016-4, "Slide Switch"
T1 T2 T4: library part CMP-013-00038-1, "Small Signal Field-Effect Transistor, 0.23A I(D), 20V, 1-Element, N-Channel, Silicon, Metal-oxide Semiconductor FET", Max Operating Temperature=150°C, Pins=3, RoHS Compliant=Yes
T5: library part CMP-013-00036-3, "Small Signal Field-Effect Transistor, 3.7A I(D), 20V, 1-Element, P-Channel, Silicon, Metal-oxide Semiconductor FET, TO-236AB", Max Operating Temperature=150°C, Pins=3, RoHS Compliant=Yes
U1: library part CMP-020-00027-5, "Ultra-low-power with FPU Arm Cortex-M33 MCU with TrustZone, 160 MHz with 2 Mbytes of Flash memory"
U2: library part CMP-019-00075-1, "Fixed LDO Voltage Regulator, 2.3V to 24V in, 360mV Drop, 3.3V out, 200mA out, SOT-25-5", Max Supply Voltage=24V, Output Voltage=3.3V
U3: library part CMP-019-00076-1, "1-cell, 1-A stand-alone linear battery charger with power path and solar input support 10-WSON -40 to 125", Pins=10
U4: library part CMP-00025-00003-6, "Bluetooth Modules - 802.15.1 Bluetooth Low Energy BLE Module, Shielded, Antenna, ASCII Interface, 9x11.5mm"
U6: library part CMP-019-00067-1, "LDO Voltage Regulators LDO CMOS LowCurr. 1.8V fixed"
X1: library part CMP-00100-3, "Parallel - Fundamental Quartz Crystal, 0.032768MHz Nom", Frequency Stability=0.0144%, Frequency Tolerance=20ppm, Load Capacitance=12.5pF, Manufacturer Series=NX2012SA, Max Operating Temperature=85°C, Min Operating Temperature=-40°C, Operating Frequency-Nom=0.032768, Crystal/Resonator Type="PARALLEL - FUNDAMENTAL", Drive Level=0.1uW, ESR=80k, Mounting Technology="Surface Mount", Reach SVHC Compliant=Yes, RoHS Compliant=Yes
Y1: library part CMP-003-00032-4, "Cristalli WE-XTAL 24.0MHz 15ppm 1.6 x 1.2mm"

## Free pads (board coordinates)
  round 1 smd paste-2539.97 mask+0.102: ""(0.9,7.7) ""(72,-4.6)
  round 1 smd far side paste-2539.97 mask+0.102: ""(14.6,0.1) ""(47.4,8.5)

## Via types
v1: diameter 0.5, hole 0.2, Top Layer to Bottom Layer, 125 vias
v2: diameter 0.5, hole 0.254, Top Layer to Bottom Layer, 42 vias
v3: diameter 0.6, hole 0.3, Top Layer to Bottom Layer, 27 vias

## Nets (pads, with @x,y where several pads share a name; then routed paths per layer and width w, separated by ;. In a path a pad name is that pad's centre, name@x,y a point inside that pad or via, vN(x,y) a via of type N, cw(c..) or ccw(c..) an arc to the next point about the centre after c; other vN are vias at no path point)
1V8: C1.2 C36.2 C41.2 CONN2.9 J11.1 R3.2 R10.2 R20.1 R22.2 S1.5 S1.8 T2.1 T4.1 U6.5 | length 19.7
  Top Layer w0.3: CONN2.9@4.15,8.56 4.15,7.804 4.2,7.754 v1(4.2,7.7) ; U6.5@52.201,-1.25 52.801,-1.25 52.794,-1.244 53.29,-1.244 53.446,-1.4 v1(53.5,-1.4) ; v1@53.562,-1.4 53.562,-2.162 v1(53.6,-2.2) 53.638,-2.238 54.088,-2.238 55.15,-3.3 C41.2@55.25,-3.3
  Bottom Layer w0.3: T4.1@75.1,1.4 76.2,1.4 76.3,1.5 ; T2.1@75.1,3.4 v1(75.1,3) 75.916,3 76.016,3.1 R3.2@76.3,3.1 ; R10.2@76.2,0.7 76.3,0.8 76.3,1.5 ; v1(76.65,1.734) 76.596,1.734 76.362,1.5 76.3,1.5 ; J11.1@77.5,-1.7 77.75,-1.7 79.112,-0.338 79.662,-0.338 v1(79.7,-0.3) 80.241,0.241 S1.8@80.241,1.13 ; R22.2@77.5,1.4 78,1.4 v1(78.1,1.3) ; v1(78.153,4.953) 78.7,5.5 78.7,5.554 78.871,5.725 79.375,5.725 R20.1@79.7,5.4 ; S1.8@80.241,1.27 S1.8@80.241,1.13 ; S1.5@80.38,2.9 80.385,2.906 80.906,2.906 81.1,3.1 C36.2@81.4,3.1 81.438,3.1 v1@81.438,3.454 ; C1.2@81.4,1.2 81.34,1.2 81.34,1.14 81,0.8 80.91,0.71 80.661,0.71 S1.8@80.241,1.13
  other v1: 81.388,3.278
3V3: C3.2 C37.2 CONN2.1 D1.1 J10.1 M1.3 M1.7 M1.8 R4.2 R5.2 R8.2 R9.2 R11.2 R23.2 R24.2 SW2.3 SW2.4 SW3.1 SW3.2 U2.5 | length 28.3
  Top Layer w0.2: v1(5.533,9.106) 5.54,9.098 5.54,8.676 5.541,8.674 CONN2.1@5.541,8.602
  Top Layer w0.3: SW3.2@18.346,6.685 SW3.2@18.346,6.881 ; SW3.1@18.481,0.519 18.759,0.241 v3(18.759,0.222) ; v3@19.243,5.457 v3(19.3,5.4) ; R24.2@64.8,6.9 64.911,6.9 65.246,6.565 v1(65.3,6.565) ; v1(66,0.1) 66.038,0.138 66.406,0.138 67.122,0.854 SW2.4@67.319,0.854 SW2.4@67.516,0.854 ; v1(73.9,2.3) 74.7,2.3 R4.2@75.1,1.9 ; R11.2@75.746,3.8 R11.2@75.8,3.8 76.02,4.02 v1(76.02,4.56) 76.02,5.1 75.9,5.22 R5.2@75.9,6
  Bottom Layer w0.3: v1(5.533,9.106) 5.533,9.579 5.854,9.9 7.1,9.9 8.13,8.87 8.13,8.555 8.285,8.4 R8.2@8.297,8.4 R9.2@8.297,7.4 ; v3(18.759,0.222) 18.77,0.211 20.989,0.211 J10.1@21,0.2 ; 40.8,1.925 40.778,1.903 40.778,1.102 41.085,0.795 41.295,0.795 M1.7@41.355,0.735 41.415,0.675 41.825,0.675 42,0.5 v1(48.4,0.5) ; 40.838,2.062 41.298,2.062 M1.8@41.355,2.005 ; v1(48.5,-0.4) 48.554,-0.4 48.629,-0.475 49.185,-0.475 M1.3@49.245,-0.535 50.275,-0.535 50.74,-1 C37.2@50.8,-1 ; R23.2@58.5,8 58.5,7.9 v1(59.6,6.8)
  other v1: 73.9,0.3
  other v3: 18.9,1.7 18.7,4.6
3V3_BLE: R15.2 R24.1 U4.14 | length 2.9
  Top Layer w0.15: U4.14@63.168,6.53 64.57,6.53 R24.1@64.8,6.3 R15.2@64.8,5.097
5V_USB: C4.2 C33.2 C34.2 CONN1.A4 CONN1.A9 D2.4 R25.1 U1.42 U3.10 | length 17.4
  Top Layer w0.3: v1(26.6,6.45) 26.638,6.488 27.206,6.488 27.256,6.538 27.505,6.538 27.9,6.143 C34.2@27.9,6.041 ; C34.2@28.001,6.041 28.103,5.94 28.306,5.94 ; CONN1.A4@28.362,4.698 28.362,5.862 ; CONN1.A9@33.061,4.197 33.061,5.506 33.3,5.745 v1@33.3,5.776 ; v1(33.3,5.791) 33.338,5.753 33.507,5.753 33.7,5.56 C33.2@33.7,5.5 ; R25.1@39.7,0.7 39.7,0.227 40.267,-0.34 41.624,-0.34 41.8,-0.516 C4.2@41.8,-1 ; C4.2@41.85,-0.996 41.85,-1.11 42.824,-1.11 43,-0.934 43,0.871 42.8,1.071 v1(42.8,1.125) 42.762,1.163 42.762,1.563 U3.10@42.6,1.725
  Bottom Layer w0.3: v1(26.6,6.45) 27.75,6.45 D2.4@27.8,6.5 ; U1.42@60.062,2.65 62.254,2.65 62.504,2.4 v3(62.6,2.4) 62.6,2.45 63,2.85 v3(63,2.9)
BATT: C6.2 T5.2 U3.2 | length 42.5
  Top Layer w0.3: U3.2@42.2,4.1 42.2,5.04 42.3,5.14 C6.2@42.3,5.2
  Top Layer w0.5: v3(40,5.525) 40.018,5.525 40.343,5.2 C6.2@42.3,5.2
  Layer 1 w0.8: v3(7.4,3.7) 7.419,3.719 7.419,5.119 9.7,7.4 36.9,7.4 38.775,5.525 v3(40,5.525)
  Bottom Layer w0.5: 4.95,4.75 4.981,4.719 6.036,4.719 6.073,4.683 6.073,4.254 6.6,3.727 v3(6.6,3.7) v3(7.4,3.7)
  other v3: 39.3,5.525
BATT_POS: J3.1 T5.3 | length 5.7
  Top Layer w0.5: v3(2.595,6.573) 2.61,6.558 v3@2.61,6.45 ; v3@2.61,4.517 2.61,4.95 ; v3(3.42,6.557) 3.439,6.538 3.439,6.161 4.486,5.114 5.083,5.114 J3.1@5.148,5.049
  Bottom Layer w0.5: 2.54,5.7 2.55,5.7 2.55,5.719 2.581,5.75 ; v3@2.6,4.527 2.8,4.327 v3@2.8,4.3 ; 2.6,5.65 2.65,5.7 ; T5.3@3.181,5.75 3.181,6.754 ; 3.2,4.527 T5.3@3.2,5.65
  other v3: 2.575,4.3 3.4,4.3
BLE_BLUE_LED: R35.2 U4.12 | length 58.3
  Top Layer w0.15: R35.2@15.026,0.786 15.471,0.786 15.557,0.7 16.755,1.898 16.755,7.555 17.4,8.2 34.9,8.2 35.425,7.675 37.876,7.675 38.211,8.01 38.211,8.379 39.132,9.3 40.5,9.3 41.2,10 45.711,10 46.811,8.9 49.9,8.9 53.588,5.212 58.688,5.212 59.738,4.162 63.014,4.162 U4.12@63.043,4.133
BLE_CONFIG: U1.50 U4.16 | length 6.1
  Top Layer w0.15: v1(61.3,8.1) 62.126,8.926 U4.16@63.294,8.926
  Bottom Layer w0.15: v1(61.3,8.1) 61.3,7.054 61.954,6.4 62.462,6.4 62.55,6.488 U1.50@62.55,7.638
BLE_P0_0: U1.37 U4.11 | length 3.9
  Top Layer w0.15: U4.11@61.708,2.551 61.9,2.359 v1(61.9,1.625)
  Bottom Layer w0.15: U1.37@60.062,0.15 61.15,0.15 61.9,0.9 v1(61.9,1.625)
BLE_P3_6: U1.38 U4.9 | length 4.2
  Top Layer w0.15: v1(58.437,1.564) 58.468,1.533 59.133,1.533 59.311,1.711 U4.9@59.311,2.676
  Bottom Layer w0.15: v1(58.437,1.564) 58.5,1.501 58.5,1 58.85,0.65 U1.38@60.062,0.65
BLE_RESET: R15.1 U1.40 U4.10 | length 7.4
  Top Layer w0.15: v1(61,1.625) 61,1.71 60.51,2.2 U4.10@60.51,2.613 60.7,2.804 60.7,3.5 64.397,3.5 64.558,3.661 64.57,3.661 64.8,3.891 R15.1@64.8,3.903
  Bottom Layer w0.15: U1.40@60.062,1.65 60.075,1.637 60.987,1.637 v1(61,1.625)
BLE_UART_RX_IND: U1.39 U4.6 | length 6.3
  Top Layer w0.15: U4.6@55.716,2.865 55.716,1.884 v1(56,1.6)
  Bottom Layer w0.15: v1(56,1.6) 56.55,2.15 58.762,2.15 58.982,1.93 58.982,1.599 59.149,1.432 59.149,1.428 59.252,1.325 59.256,1.325 59.356,1.225 59.987,1.225 U1.39@60.062,1.15
CC1: CONN1.A5 R17.2 | length 3.2
  Top Layer w0.15: R17.2@28.4,7 28.9,7 29.403,6.497 CONN1.A5@29.403,4.494
CC2: CONN1.B5 R16.2 | length 2.7
  Top Layer w0.156: CONN1.B5@32.417,4.521 32.501,5.002 32.666,5.394 32.692,5.688 32.692,6.392 33,6.7 R16.2@33.4,6.7